# Altium PCB FSR_Array_PCB.PcbDoc
Units mm, origin at the board's own origin, x right, y up, seen from the top; angles counter-clockwise.
Board outline 42 x 55 mm, 2 copper layers (Top Layer, Bottom Layer); 28 components, 35 nets, 157 pads, 38 vias.
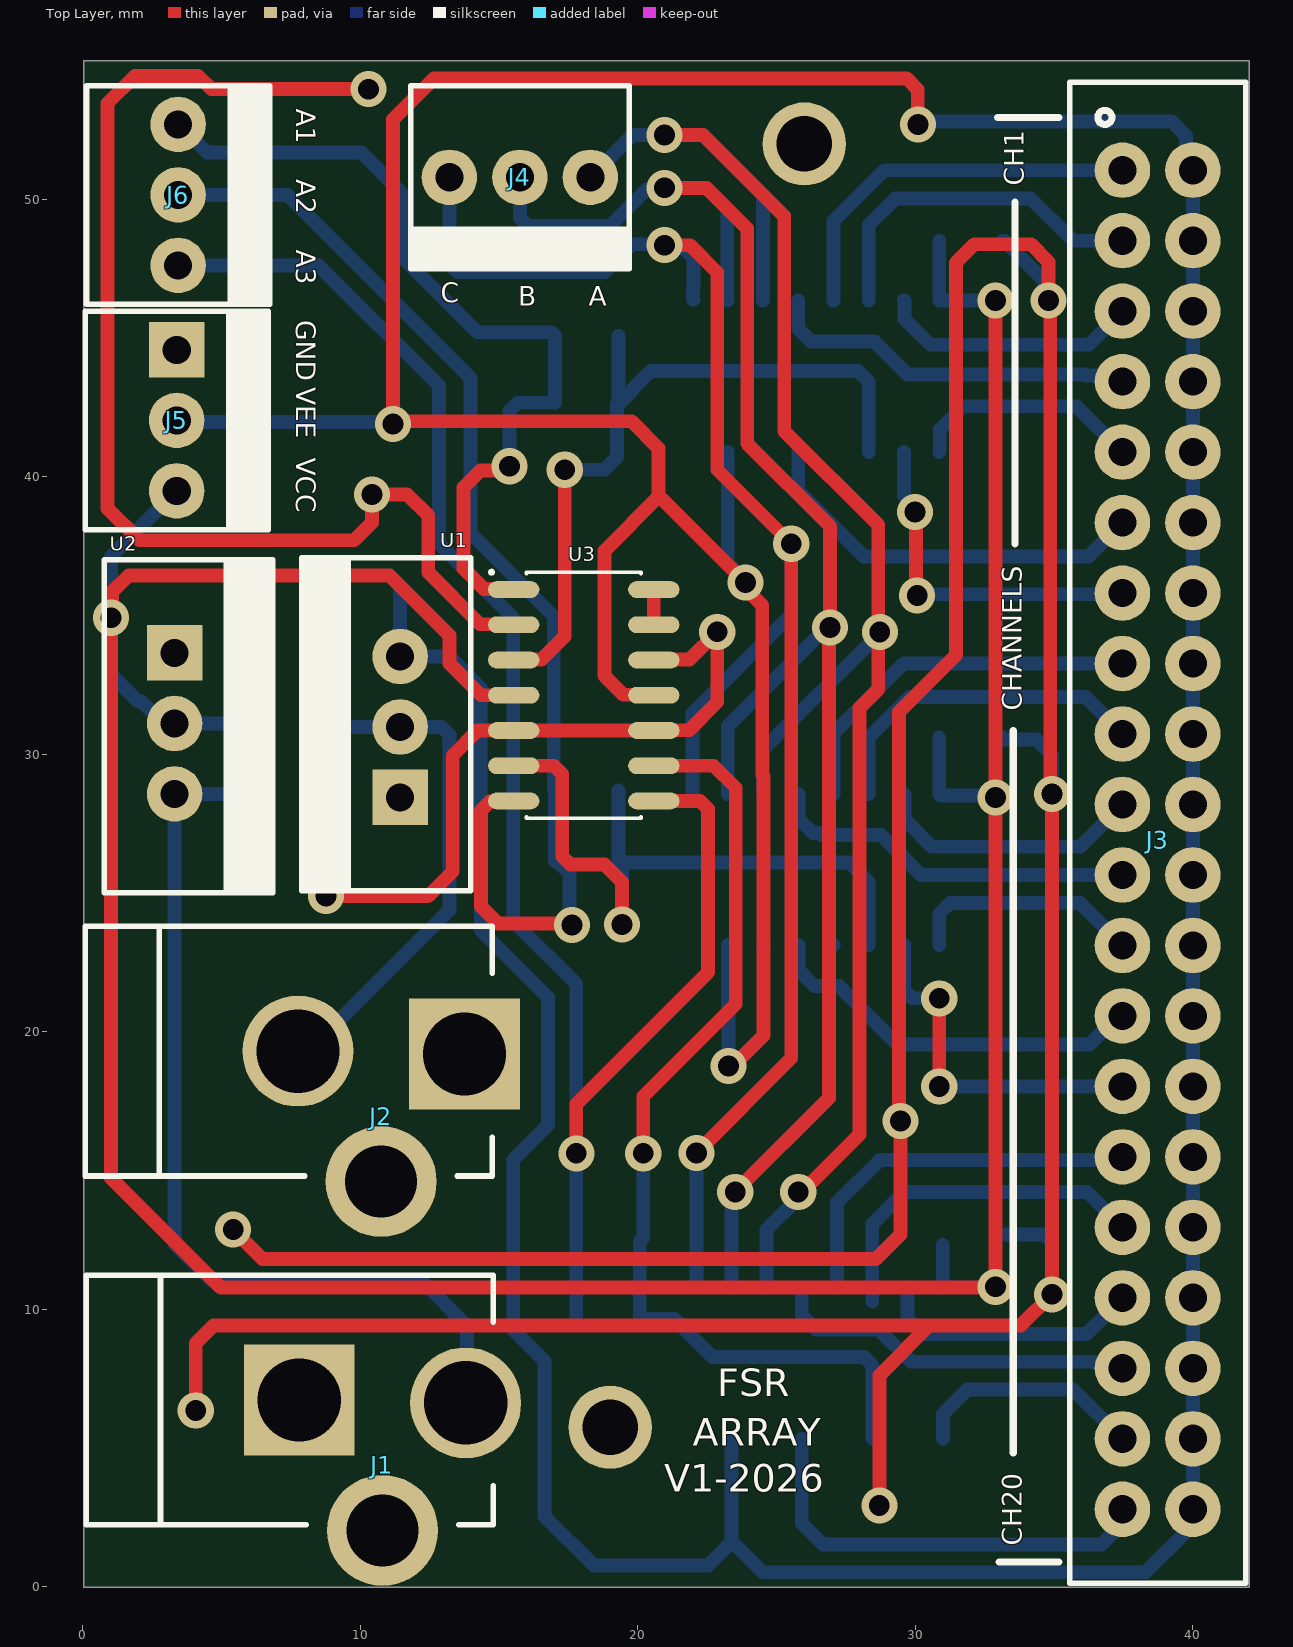
[diagram p0: Top Layer view]
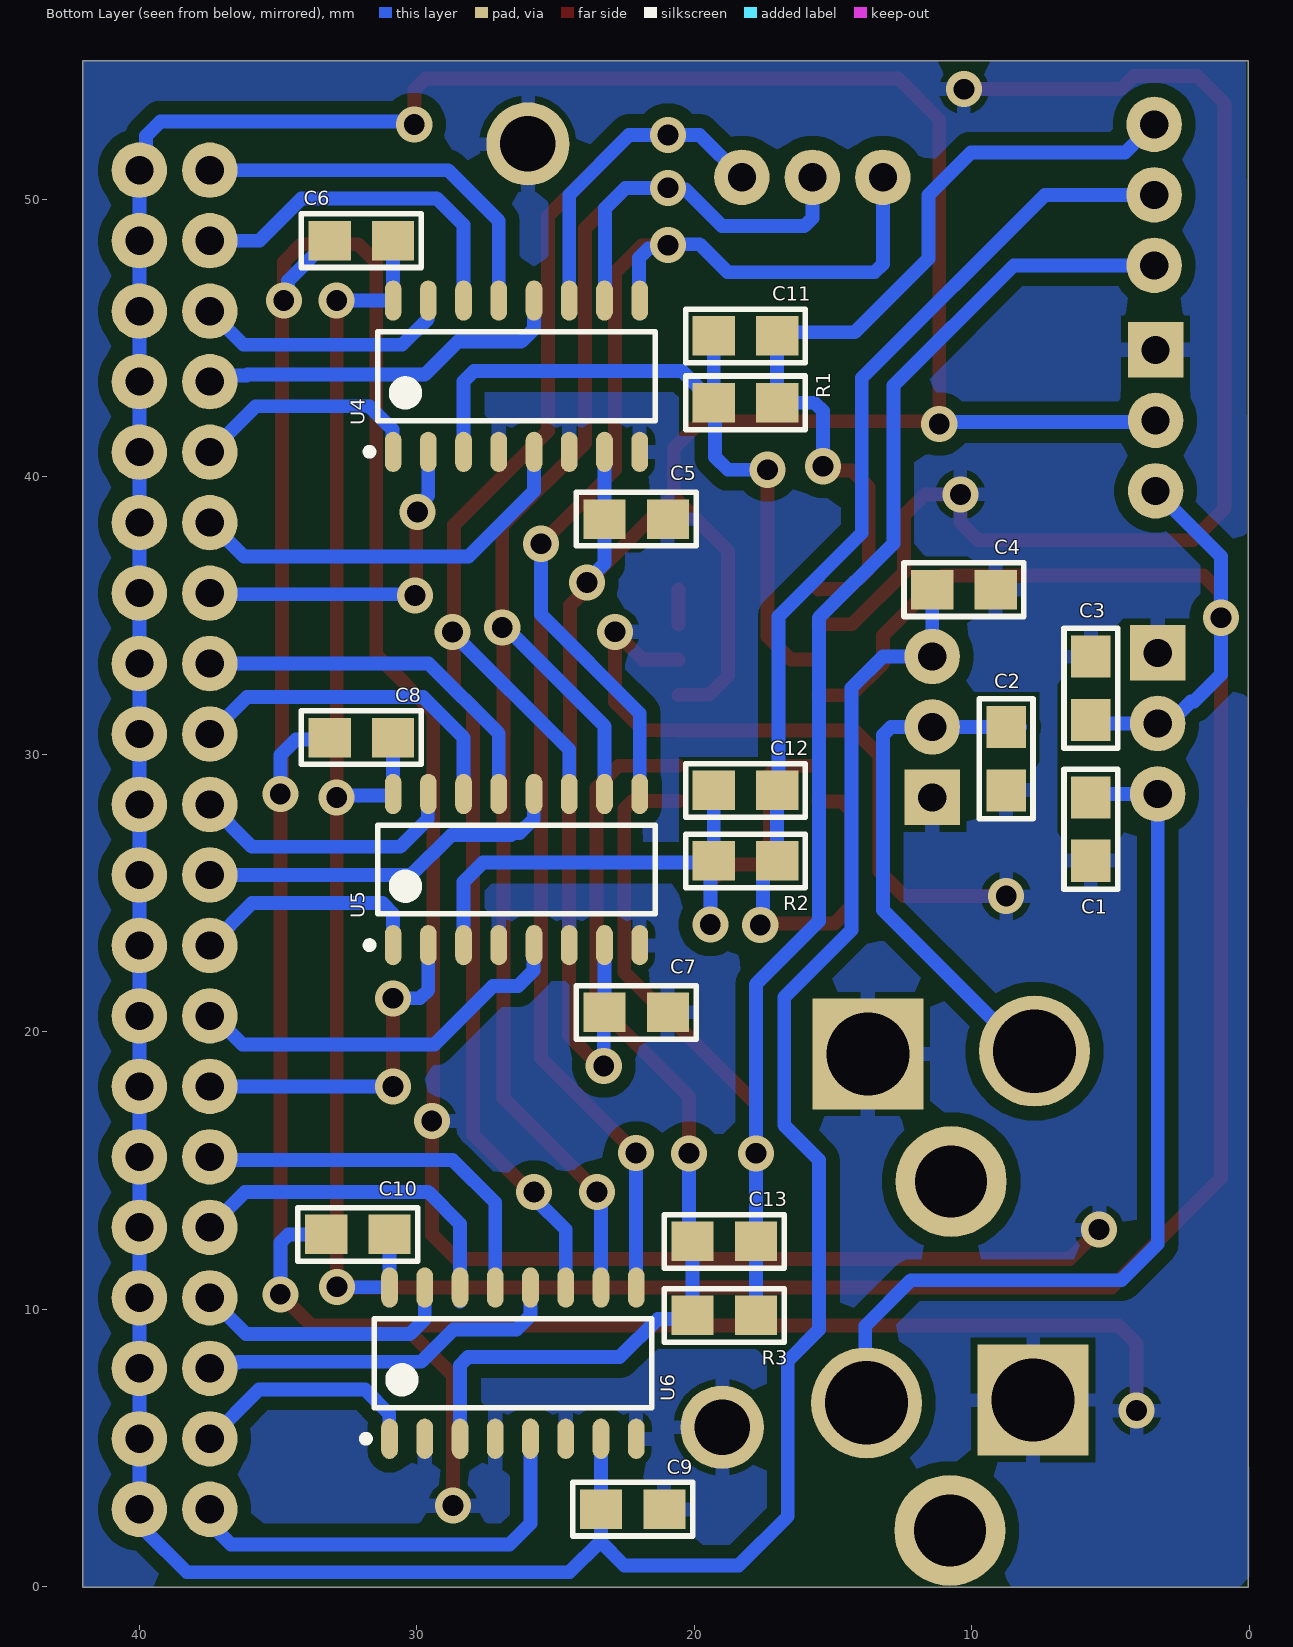
[diagram p1: Bottom Layer view, seen from below]

## Layer stack, top to bottom
Top Solder: solder mask 0.0102, Solder Resist, Dk 3.5
Top Layer: signal copper 0.0356
Dielectric 1: dielectric 0.32, FR-4, Dk 4.8
Bottom Layer: signal copper 0.0356
Bottom Solder: solder mask 0.0102, Solder Resist, Dk 3.5

## Board outline
0.037,-0.009 0.037,54.991 42.037,54.991 42.037,-0.009

## Design rules (kind name [scope] priority, off if disabled: settings)
Clearance [All] p1: gap=0.5 ignorepadtopadclearanceinfootprint=FALSE
PolygonConnect [All] p1: connectstyle=Relief reliefconductorwidth=0.5 reliefentries=4 polygonreliefangle="90 Angle" airgapwidth=0.25
RoutingVias [All] p1: holewidth=0.75 width=1.3 viastyle="Through Hole" minholewidth=0.75 minwidth=1.3 maxholewidth=0.75 maxwidth=1.3
SolderMaskExpansion [All] p1: expansion=0 istentingtop=FALSE
SupplyNets "Schematic Supply Nets_2" [InNet('-5')] p1: voltage=0.000
SupplyNets "Schematic Supply Nets_1" [InNet('GND')] p2: voltage=0.000
SupplyNets "Schematic Supply Nets" [InNet('+5')] p3: voltage=0.000
Width [All] p1: maxlimit=0.5 minlimit=0.5 preferedwidth=0.5
30 further rules are at their usual default settings.

## Components (designator, comment, footprint, x,y, rotation, side; value= is the part's Value field where it differs from the comment)
C1 "330n" 0805 5.715,27.305 r270 bottom
C2 "330n" 0805 8.763,29.845 r90 bottom
C3 "100n" 0805 5.715,32.385 r90 bottom
C4 "100n" 0805 10.287,35.935 r0 bottom
C5 "100n" 0805 22.098,38.481 r180 bottom
C6 "100n" 0805 32.004,48.514 r0 bottom
C7 "100n" 0805 22.098,20.701 r180 bottom
C8 "100n" 0805 32.004,30.607 r0 bottom
C9 "100n" 0805 22.225,2.794 r180 bottom
C10 "100n" 0805 32.131,12.7 r0 bottom
C11 "1n" 0805 18.161,45.085 r180 bottom
C12 "1n" 0805 18.161,28.702 r180 bottom
C13 "1n" 0805 18.923,12.446 r180 bottom
J1 "JACKDC" JACKDC#1 13.795,6.732 r180 top
J2 "JACKDC" JACKDC#2 13.747,19.304 r180 top
J3 "CON20*2" SIP20*2 35.56,54.229 r270 top
J4 "MOLEX3" MOLEX3#1 18.288,50.8 r180 top
J5 "MOLEX3" MOLEX3#2 3.379,44.577 r270 top
J6 "MOLEX3" MOLEX3#1 3.429,52.705 r270 top
R1 "1k" 0805 18.161,42.672 r0 bottom
R2 "1k" 0805 18.161,26.162 r0 bottom
R3 "1k" 0805 18.923,9.779 r0 bottom
U1 "LM7905" "TO-220 V" 11.43,30.988 r90 top
U2 "LM7805" "TO-220 V" 3.302,31.115 r270 top
U3 "TL084" SOIC-14 18.049,32.131 r0 top
U4 "CD4051" CD4051 26.416,43.63 r90 bottom
U5 "CD4051" CD4051 26.416,25.85 r90 bottom
U6 "CD4051" CD4051 26.543,8.059 r90 bottom

## Footprints (in the part's own frame and the unit in brackets; to place one, negate y for a bottom-side part, rotate by r counter-clockwise, add the part's x,y. Pads: shape width x height; smd on the part's side, far side on the other; paste and mask are expansions set on the pad)
0805 [mil] "Pasivo 0805"
  rect 60x56 smd: 1(-45,0) 2(45,0)
  silkscreen extent -85,-38 85,38, body extent -40,-25 39,25, height 15
CD4051 [mm] "SOP, 16-Leads, Body 9,90x3,90mm, Pitch 1,27mm, IPC Medium Density"
  oval 1.45x0.6 smd: 1(-2.725,4.445) 2(-2.725,3.175) 3(-2.725,1.905) 4(-2.725,0.635) 5(-2.725,-0.635) 6(-2.725,-1.905) 7(-2.725,-3.175) 8(-2.725,-4.445) 9(2.725,-4.445) 10(2.725,-3.175) 11(2.725,-1.905) 12(2.725,-0.635) 13(2.725,0.635) 14(2.725,1.905) 15(2.725,3.175) 16(2.725,4.445)
  silkscreen extent -2.85,-5 1.6,5.42, body extent -2,-5 2,5, height 1.75
JACKDC#1 [mm]
  round 4 hole 3: 1(0,0.102)
  rect 4x4 hole 3: 2(6,0)
  round 4 hole 2.6: 3(3,4.7)
  silkscreen extent -1,-4.5 13.67,4.5, body extent -0.16,-4.5 13.67,5.01, height 11
JACKDC#2 [mm]
  rect 4x4 hole 3: 1(0,0.102)
  round 4 hole 3: 2(6,0)
  round 4 hole 2.6: 3(3,4.7)
  silkscreen extent -1,-4.5 13.67,4.5, body extent -0.16,-4.5 13.67,5.01, height 11
MOLEX3#1 [mm]
  round 2 hole 1.016: 1(0,0) 2(2.54,0) 3(5.08,0)
  silkscreen extent -1.4,-3.3 6.48,3.3, body extent -1.27,-3.17 6.35,3.18, height 10.74
MOLEX3#2 [mm]
  rect 2x2 hole 1.016: 1(0,0)
  round 2 hole 1.016: 2(2.54,0) 3(5.08,0)
  silkscreen extent -1.4,-3.3 6.48,3.3, body extent -1.27,-3.18 6.35,3.18, height 10.74
SIP20*2 [mm]
  round 2 hole 1.016: 1(3.175,1.905) 2(5.715,1.905) 3(8.255,1.905) 4(10.795,1.905) 5(13.335,1.905) 6(15.875,1.905) 7(18.415,1.905) 8(20.955,1.905) 9(23.495,1.905) 10(26.035,1.905) 11(28.575,1.905) 12(31.115,1.905) 13(33.655,1.905) 14(36.195,1.905) 15(38.735,1.905) 16(41.275,1.905) 17(43.815,1.905) 18(46.355,1.905) 19(48.895,1.905) 20(51.435,1.905) 21(51.435,4.445) 22(48.895,4.445) 23(46.355,4.445) 24(43.815,4.445) 25(41.275,4.445) 26(38.735,4.445) 27(36.195,4.445) 28(33.655,4.445) 29(31.115,4.445) 30(28.575,4.445) 31(26.035,4.445) 32(23.495,4.445) 33(20.955,4.445) 34(18.415,4.445) 35(15.875,4.445) 36(13.335,4.445) 37(10.795,4.445) 38(8.255,4.445) 39(5.715,4.445) 40(3.175,4.445)
  silkscreen extent 0,0 54.1,6.35, body extent 1.91,0.61 52.71,5.69, height 10.1
SOIC-14 [mm] "SOIC, 14-Leads, Body 8.65x3.90mm, Pitch 1.27mm, IPC Medium Density"
  oval 1.85x0.6 smd: 1(-2.525,3.81) 2(-2.525,2.54) 3(-2.525,1.27) 4(-2.525,0) 5(-2.525,-1.27) 6(-2.525,-2.54) 7(-2.525,-3.81) 8(2.525,-3.81) 9(2.525,-2.54) 10(2.525,-1.27) 11(2.525,0) 12(2.525,1.27) 13(2.525,2.54) 14(2.525,3.81)
  silkscreen extent -3.39,-4.44 2.06,4.5, body extent -3,-4.33 3,4.33, height 2.65
"TO-220 V" [mm]
  rect 2x2 hole 1.016: 1(-2.54,0)
  round 2 hole 1.016: 2(0,0) 3(2.54,0)
  silkscreen extent -5.9,-2.54 6.1,3.54, body extent -5,-2 5,3, height 18

## Part data
C1 C2 C3 C4 C5 C6 C7 C8 C9 C10 C11 C12 C13: library part CAP
R1 R2 R3: library part RES

## Free pads (board coordinates)
  round 3 hole 2: 1(19,5.75) 1(26,52)

## Via types
v1: diameter 1.3, hole 0.75, Top Layer to Bottom Layer, 38 vias

## Nets (pads, with @x,y where several pads share a name; then routed paths per layer and width w, separated by ;. In a path a pad name is that pad's centre, name@x,y a point inside that pad or via, vN(x,y) a via of type N, cw(c..) or ccw(c..) an arc to the next point about the centre after c; other vN are vias at no path point)
+5: C3.1 C6.1 C8.1 C10.1 J5.3 U2.2 U3.4 U4.16 U5.16 U6.16 | length 131.6
  Top Layer w0.5: U3.4 14.351,32.131 13.208,33.274 13.208,34.29 11.049,36.449 1.651,36.449 1.051,35.849 1.051,34.96 v1(1.016,34.925) 1.016,14.732 4.964,10.784 32.861,10.784 v1(32.888,10.81) ; v1@32.893,10.81 32.89,10.813 32.89,28.445 v1(32.893,28.448) v1(32.893,46.355)
  Bottom Layer w0.5: J5.3 1.016,37.134 v1(1.016,34.925) 1.016,32.88 1.991,31.905 2.106,31.905 2.896,31.115 U2.2 5.588,31.115 C3.1 ; C8.1 U5.16 30.861,28.558 30.907,28.511 32.448,28.511 v1@32.512,28.448 ; C6.1 U4.16 v1@32.754,46.355 ; C10.1@30.988,12.319 U6.16 31.001,10.797 32.875,10.797 v1(32.888,10.81)
-5: C4.2 C5.1 C7.1 C9.1 J3.21 J3.22 J3.23 J3.24 J3.25 J3.26 J3.27 J3.28 J3.29 J3.30 J3.31 J3.32 J3.33 J3.34 J3.35 J3.36 J3.37 J3.38 J3.39 J3.40 J5.2 U1.3 U3.11 U4.7 U5.7 U6.7 | length 219.7
  Top Layer w0.5: U3.11 20.557,32.148 19.481,32.148 18.796,32.832 18.796,37.338 20.747,39.289 20.747,41.029 19.767,42.009 11.275,42.009 v1(11.176,41.91) 11.176,52.884 12.648,54.356 29.692,54.356 30.085,53.963 30.085,52.719 v1(30.099,52.705) ; 20.907,39.164 v1(23.876,36.195) 23.876,35.979 24.484,35.371 24.484,29.254 24.527,29.211 24.527,19.867 23.43,18.77 v1(23.267,18.77)
  Bottom Layer w0.5: J5.2 3.443,41.974 11.112,41.974 v1(11.176,41.91) ; C4.2 U1.3 13.208,33.528 14.335,32.401 14.335,23.675 16.764,21.246 16.764,16.637 15.506,15.379 15.506,9.267 16.637,8.136 16.637,2.54 18.415,0.762 22.53,0.762 23.393,1.626 24.495,0.524 38.297,0.524 39.79,2.017 39.79,2.579 J3.21 J3.22 J3.23 J3.24 J3.25 J3.26 J3.27 J3.28 J3.29 J3.30 J3.31 J3.32 J3.33 J3.34 J3.35 J3.36 J3.37 J3.38 J3.39 J3.40 39.761,51.298 39.761,52.285 39.242,52.804 30.198,52.804 v1(30.099,52.705) ; U5.7 C7.1 23.267,20.675 v1(23.267,18.77) ; U4.7 23.241,36.873 23.876,36.238 v1(23.876,36.195) ; 23.368,1.651 C9.1 U6.7
ADC1: C11.2 J6.1 R1.1 U3.1 | length 31.3
  Top Layer w0.5: v1(15.37,40.386) 15.217,40.233 14.325,40.233 13.716,39.624 13.716,36.703 14.459,35.96 15.505,35.96 U3.1
  Bottom Layer w0.5: J6.1 3.456,52.705 4.472,51.689 10.033,51.689 11.557,50.165 11.557,47.879 14.224,45.212 16.891,45.212 C11.2 R1.1 15.663,42.672 15.37,42.379 v1(15.37,40.386)
ADC2: C12.2 J6.2 R2.1 U3.7 | length 42.9
  Top Layer w0.5: U3.7 15.505,28.302 14.675,28.302 14.351,27.978 14.351,24.511 14.951,23.911 17.566,23.911 v1(17.627,23.85)
  Bottom Layer w0.5: J6.2 7.366,50.165 13.97,43.561 13.97,37.973 16.967,34.976 16.967,28.753 C12.2 R2.1 17.069,26.162 17.53,25.701 17.53,23.947 v1(17.627,23.85)
ADC3: C13.2 J6.3 R3.1 U3.8 | length 63.1
  Top Layer w0.5: v1(17.78,15.621) 17.78,17.399 22.527,22.146 22.527,28.028 22.234,28.321 U3.8
  Bottom Layer w0.5: J6.3 8.492,47.625 12.827,43.29 12.827,37.604 15.506,34.925 15.506,23.991 17.78,21.717 v1(17.78,15.621) C13.2 ; R3.1 C13.2@17.78,12.319
CH1: J3.1 U4.13 | length 14
  Bottom Layer w0.5: U4.13 27.051,49.218 28.887,51.054 J3.1
CH2: J3.2 U4.14 | length 12.9
  Bottom Layer w0.5: U4.14 28.321,49.073 29.286,50.038 34.157,50.038 35.681,48.514 J3.2
CH3: J3.3 U4.15 | length 9.4
  Bottom Layer w0.5: U4.15 29.61,46.336 29.61,45.696 30.542,44.764 36.255,44.764 J3.3
CH4: J3.4 U4.12 | length 13
  Bottom Layer w0.5: U4.12 25.781,45.339 26.24,44.88 28.526,44.88 29.718,43.688 36.101,43.688 36.14,43.649 36.742,43.649 J3.4@36.957,43.434
CH5: J3.5 U4.1 | length 8.4
  Bottom Layer w0.5: U4.1 30.88,40.924 30.88,41.713 31.712,42.545 35.814,42.545 J3.5
CH6: J3.6 U4.5 | length 14.6
  Bottom Layer w0.5: U4.5 25.781,39.497 28.147,37.131 36.242,37.131 J3.6
CH7: J3.7 U4.2 | length 12.3
  Top Layer w0.5: v1(29.984,38.735) 30.025,38.694 30.025,35.772 v1(30.065,35.731)
  Bottom Layer w0.5: U4.2 29.591,39.336 29.984,38.943 v1(29.984,38.735) ; v1(30.065,35.731) 30.107,35.772 36.915,35.772 J3.7@36.957,35.814
CH8: J3.8 U5.13 | length 13.1
  Bottom Layer w0.5: U5.13 27.051,30.745 29.58,33.274 J3.8@36.957,33.274
CH9: J3.9 U5.14 | length 12.3
  Bottom Layer w0.5: U5.14 28.321,30.601 29.788,32.068 36.131,32.068 J3.9
CH10: J3.10 U5.15 | length 9.8
  Bottom Layer w0.5: U5.15 29.61,28.556 29.61,27.667 30.607,26.67 35.941,26.67 J3.10
CH11: J3.11 U5.12 | length 12.9
  Bottom Layer w0.5: U5.12 25.791,28.565 25.791,27.676 26.305,27.162 26.554,27.162 26.616,27.1 28.763,27.1 30.209,25.654 J3.11@36.957,25.654
CH12: J3.12 U5.1 | length 8.5
  Bottom Layer w0.5: U5.1 30.861,24.257 31.242,24.638 35.941,24.638 J3.12
CH13: J3.13 U5.5 | length 14.1
  Bottom Layer w0.5: U5.5@25.8,23.106 25.8,22.206 26.356,21.65 27.256,21.65 29.36,19.546 36.283,19.546 37.311,20.574 J3.13
CH14: J3.14 U5.2 | length 12.3
  Top Layer w0.5: v1(30.861,18.034) v1(30.861,21.209)
  Bottom Layer w0.5: U5.2 29.591,21.505 29.884,21.212 30.858,21.212 v1(30.861,21.209) ; v1(30.861,18.034) J3.14@36.957,18.034
CH15: J3.15 U6.13 | length 14
  Bottom Layer w0.5: U6.13 27.178,13.843 28.719,15.384 37.355,15.384 J3.15
CH16: J3.16 U6.14 | length 12.8
  Bottom Layer w0.5: U6.14@28.448,10.276 U6.14 28.448,13.081 29.591,14.224 36.195,14.224 J3.16
CH17: J3.17 U6.15 | length 9.6
  Bottom Layer w0.5: U6.15 29.718,9.652 30.258,9.112 36.163,9.112 J3.17
CH18: J3.18 U6.12 | length 13.4
  Bottom Layer w0.5: U6.12 25.908,9.779 26.411,9.276 28.68,9.276 29.844,8.112 36.431,8.112 36.453,8.089 37.25,8.089 J3.18
CH19: J3.19 U6.1 | length 8.5
  Bottom Layer w0.5: U6.1 30.998,5.344 30.998,6.233 31.877,7.112 35.687,7.112 J3.19
CH20: J3.20 U6.5 | length 15.7
  Bottom Layer w0.5: U6.5 25.908,2.286 26.67,1.524 36.703,1.524 37.25,2.071 37.25,2.579 J3.20
GND: C1.2 C2.1 C3.2 C4.1 C5.2 C6.2 C7.2 C8.2 C9.2 C10.2 J1.2 J2.1 J5.1 pad.1 U1.1 U2.1 U3.2 U3.5 U3.10 U3.12 U4.4 U4.6 U4.8 U5.4 U5.6 U5.8 U6.2 U6.4 U6.6 U6.8 | length 221.9
  Top Layer w0.5: v1(4.064,6.35) 4.064,8.763 4.711,9.41 30.492,9.41 ; v1(5.415,12.873) 6.477,11.811 28.575,11.811 29.464,12.7 v1(29.464,16.784) 29.414,16.834 29.414,31.536 31.465,33.587 31.465,47.721 32.131,48.387 34.163,48.387 34.798,47.752 v1(34.798,46.355) 34.861,46.291 34.861,28.639 v1(34.925,28.575) v1(34.925,10.541) 33.794,9.41 30.492,9.41 ; v1(8.763,24.892) 12.446,24.892 13.328,25.774 13.328,29.965 14.224,30.861 U3.5 U3.10 ; v1(10.287,53.975) 4.634,53.975 4.154,54.455 1.877,54.455 0.889,53.467 0.889,38.862 2.032,37.719 9.779,37.719 10.414,38.354 v1(10.414,39.37) 11.684,39.37 12.446,38.608 12.446,36.559 14.315,34.69 15.505,34.69 U3.2 ; U3.12 20.593,33.42 21.863,33.42 v1(22.86,34.417) 22.86,31.888 21.84,30.869 U3.10@20.582,30.869 ; v1(28.702,2.925) 28.702,7.62 30.492,9.41
  Bottom Layer w0.5: U5.6 U5.6@24.53,23.106 ; U5.4@27.032,23.144 U5.4 ; C8.2 33.223,30.531 34.366,30.531 34.925,29.972 v1(34.925,28.575) ; C6.2 33.198,48.514 34.651,47.061 34.651,46.502 v1(34.798,46.355) ; C10.2 34.632,12.7 34.925,12.407 v1(34.925,10.541)
IN_A: J4.1 U4.11 U5.11 U6.11 | length 66.5
  Top Layer w0.5: v1(20.955,52.324) 22.352,52.324 25.273,49.403 25.273,41.656 28.665,38.264 v1@28.665,34.416 ; v1(25.781,14.224) 25.908,14.224 27.986,16.302 27.986,31.669 28.665,32.348 28.665,34.358 v1(28.72,34.412)
  Bottom Layer w0.5: J4.1 19.812,52.324 v1(20.955,52.324) 22.352,52.324 24.511,50.165 U4.11 ; U5.11 24.511,30.173 28.72,34.382 v1(28.72,34.412) ; U6.11 24.638,12.873 25.781,14.016 v1(25.781,14.224)
IN_B: J4.2 U4.10 U5.10 U6.10 | length 65
  Top Layer w0.5: v1@21.209,50.419 22.479,50.419 23.939,48.959 23.939,41.212 26.927,38.224 v1(26.927,34.569) ; v1(23.51,14.224) 23.51,14.239 26.884,17.613 26.884,34.275 v1@27.053,34.444
  Bottom Layer w0.5: J4.2 15.748,49.33 16.041,49.037 19,49.037 20.316,50.353 21.143,50.353 21.209,50.419 22.479,50.419 23.222,49.676 23.222,46.374 U4.10 ; U5.10 23.241,31.015 26.795,34.569 v1(26.927,34.569) ; U6.10 23.368,14.082 v1(23.51,14.224)
  other v1: 20.955,50.419
IN_C: J4.3 U4.9 U5.9 U6.9 | length 66.1
  Top Layer w0.5: v1@20.99,48.352 21.879,48.352 22.86,47.371 22.86,40.259 v1(25.527,37.592) 25.527,19.05 v1(22.11,15.633)
  Bottom Layer w0.5: J4.3 13.208,47.672 13.501,47.379 18.804,47.379 19.812,48.387 20.955,48.387 21.102,48.24 21.653,48.24 22.003,47.89 22.003,46.882 21.99,46.87 21.99,46.399 U4.9@22.003,46.387 ; U5.9 21.971,31.481 25.527,35.037 v1(25.527,37.592) ; U6.9 22.11,10.796 v1(22.11,15.633)
  other v1: 20.955,48.352
NetC1_1: C1.1 J1.1 U2.3 | length 32.7
  Bottom Layer w0.5: C1.1@5.715,28.575 U2.3 3.302,12.358 4.611,11.049 12.192,11.049 13.843,9.398 13.843,7.233 J1.1@13.747,7.137
NetC2_2: C2.2 J2.2 U1.2 | length 19
  Bottom Layer w0.5: J2.2 8.128,19.304 13.208,24.384 13.208,30.695 12.915,30.988 C2.2@8.255,30.988
NetC11_1: C11.1 R1.2 U3.3 U4.3 | length 26.9
  Top Layer w0.5: U3.3 15.543,33.42 16.529,33.42 17.363,34.254 v1(17.363,40.259)
  Bottom Layer w0.5: v1(17.363,40.259) 18.796,40.259 19.253,40.716 19.253,42.621 R1.2 ; C11.1 R1.2 ; U4.3 28.321,43.434 27.94,43.815 20.447,43.815 19.816,43.184 19.816,43.133 19.355,42.672 R1.2
NetC12_1: C12.1 R2.2 U3.6 U5.3 | length 25.3
  Top Layer w0.5: U3.6 16.979,29.591 17.272,29.298 17.272,26.328 17.565,26.035 18.796,26.035 19.431,25.4 19.431,23.876 v1(19.427,23.872)
  Bottom Layer w0.5: C12.1 R2.2 19.427,26.039 v1(19.427,23.872) ; R2.2@19.366,26.1 27.621,26.1 28.321,25.4 U5.3
NetC13_1: C13.1 R3.2 U3.9 U6.3 | length 35.3
  Top Layer w0.5: v1(20.193,15.621) 20.193,17.676 23.527,21.01 23.527,28.797 22.733,29.591 U3.9
  Bottom Layer w0.5: R3.2@20.066,9.652 21.32,9.652 22.696,8.276 28.155,8.276 28.448,7.983 U6.3 ; R3.2 C13.1@20.066,12.319 ; C13.1 20.193,12.573 v1(20.193,15.621)
NetU3_13: U3.13 U3.14 | length 1.3
  Top Layer w0.5: U3.13 U3.14
pads on no net: J1.3 J2.3

## Polygon pours and split planes (outlines as drawn)
GND on Bottom Layer "GND_L02_P000" (solid, remove dead copper, pour order 0): 0.127,54.991 42.037,54.991 42.037,0 0,0

## Silkscreen, mask and mechanical layers (free items; w line width, h text height)
Top Overlay:
  lines w0.254: 32.956,52.959 35.179,52.959 ; 33.02,0.889 35.179,0.889 ; 33.528,4.826 33.528,30.861 ; 33.591,37.592 33.591,49.911
  text "A1" at 7.693,53.267 h0.7 r270
  text "A2" at 7.693,50.727 h0.7 r270
  text "CH1" at 33.9,50.492 h0.7 r90
  text "A3" at 7.693,48.187 h0.7 r270
  text "C" at 12.9,46.301 h0.7
  text "B" at 15.694,46.174 h0.7
  text "A" at 18.234,46.174 h0.7
  text "GND" at 7.693,45.647 h0.7 r270
  text "VEE" at 7.693,43.234 h0.7 r270
  text "VCC" at 7.693,40.694 h0.7 r270
  text "CHANNELS" at 33.836,31.569 h0.7 r90
  text "FSR" at 22.86,6.858 h1
  text "ARRAY" at 21.971,5.08 h1
  text "V1-2026" at 20.955,3.429 h1
  text "CH20" at 33.836,1.47 h0.7 r90
Mechanical 15:
  the board outline again, w0.254